# Altium PCB Science-Rev02.PcbDoc (part 2 of 2)
Units mil, origin at the board's own origin, x right, y up, seen from the top; angles counter-clockwise.
Board outline 3390 x 2510 mil, 4 copper layers (Top Layer, Ground Plane, Power Plane, Bottom Layer), stack 23.756 mil thick; 95 components, 67 nets, 328 pads, 254 vias.
Unrouted connection lines stored in the file: 116.
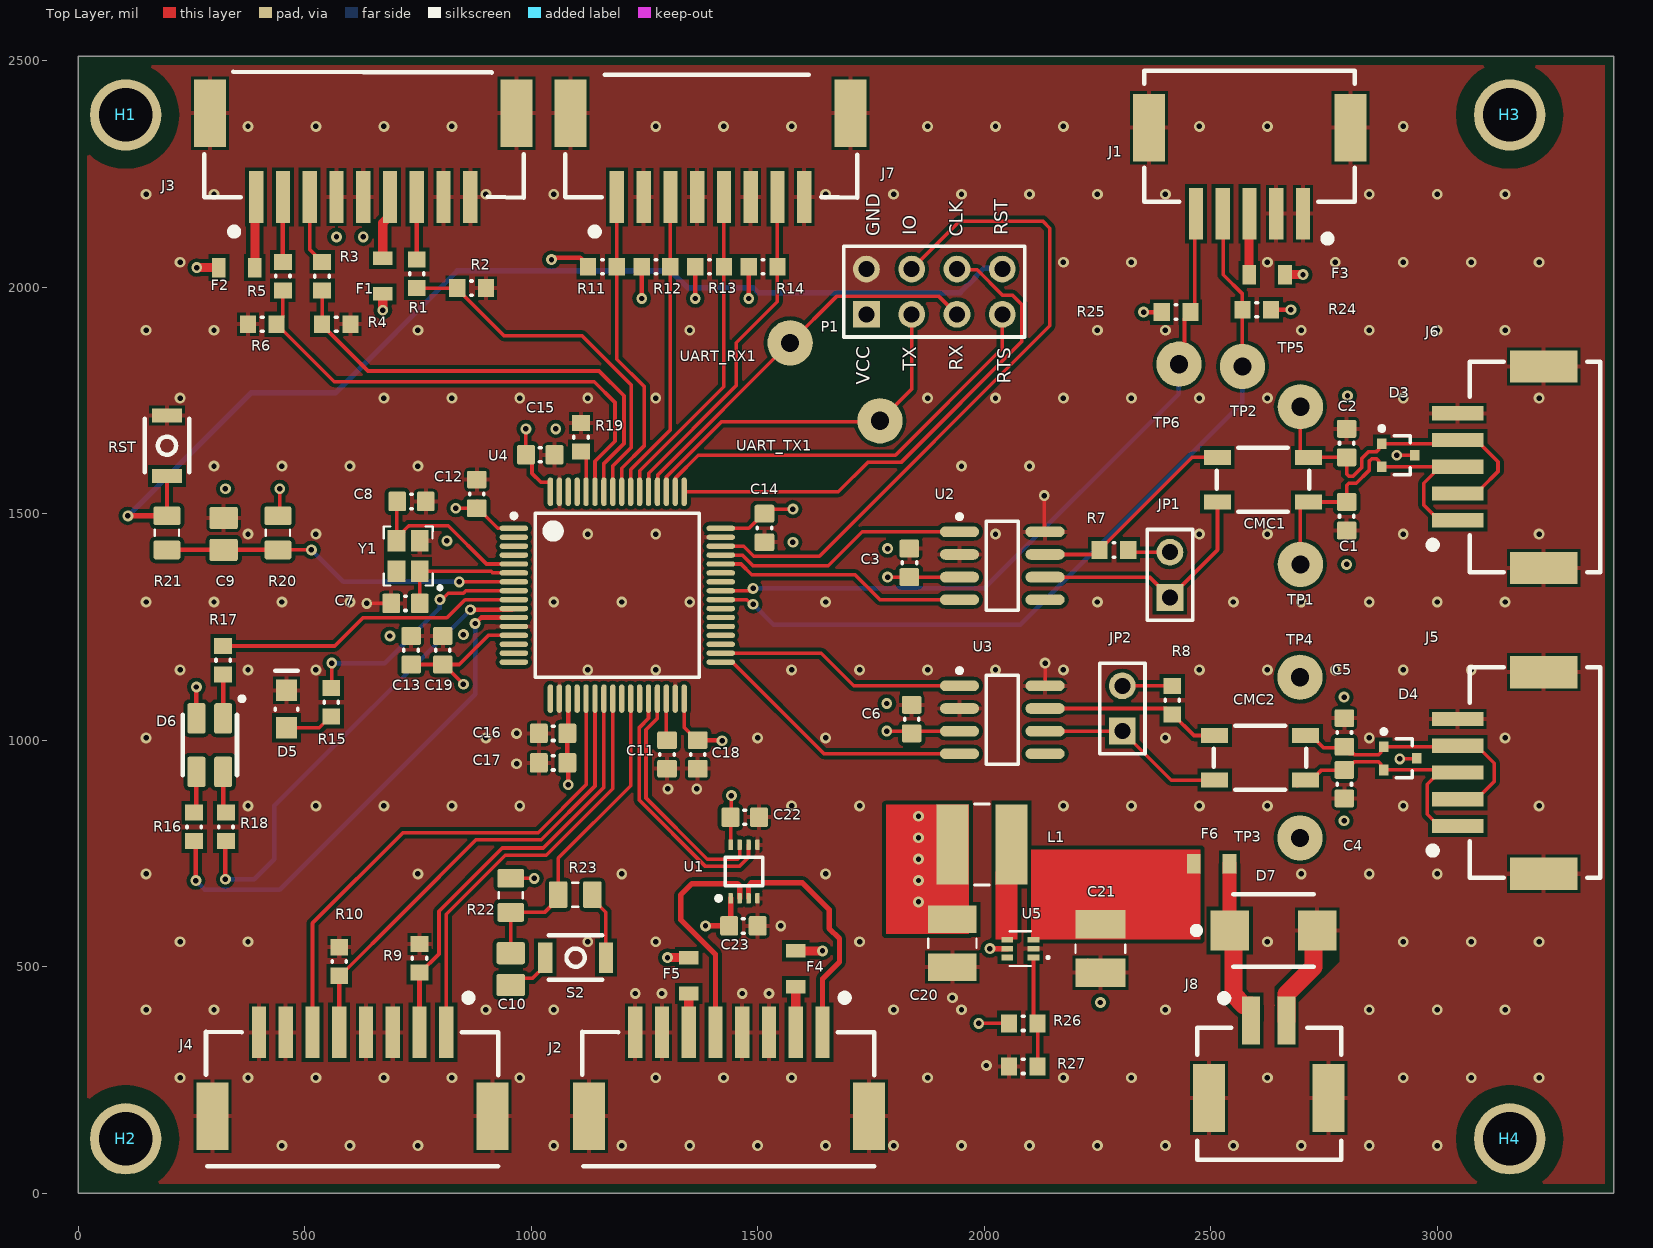
[diagram p0: Top Layer view]

## Via types
v1: diameter 24, hole 12, Top Layer to Bottom Layer, tented both sides, 254 vias

## Nets (pads, with @x,y where several pads share a name; then routed paths per layer and width w, separated by ;. In a path a pad name is that pad's centre, name@x,y a point inside that pad or via, vN(x,y) a via of type N, cw(c..) or ccw(c..) an arc to the next point about the centre after c; other vN are vias at no path point) (continued)
NetF2_1: F2.1 J3.1 | length 159.8
  Top Layer w8: J3.1@390,2195.76 J3.1 ; J3.1@390,2215.37 J3.1@391.89,2217.26
  Top Layer w20: F2.1 J3.1@390,2195.76
NetF3_2: F3.2 J1.3 | length 110.8
  Top Layer w8: J1.3@2584.12,2160.79 J1.3
  Top Layer w20: F3.2 J1.3@2584.96,2136.39
NetF4_1: F4.1 J2.2 | length 100.8
  Top Layer w20: J2.2 F4.1
NetF5_1: F5.1 J2.6 | length 85.8
  Top Layer w20: J2.6 F5.1
NetJP1_2: JP1.2 R7.2 | length 94.1
  Top Layer w8: R7.2 2322.99,1415 JP1.2
NetJP2_2: JP2.2 R8.2 | length 110.2
  Top Layer w8: JP2.2 2414.41,1120 R8.2
NetL1_1: L1.1 U5.4 | length 12.7
  Top Layer w8: L1.1@2050.97,760.68 L1.1
NetR19_1: R19.1 U4.60 | length 93.3
  Top Layer w8: R19.1 1121.26,1625.75 U4.60
NetR23_2: R23.2 S2.1 | length 151.3
  Top Layer w8: R23.2 1135,649.98 1165,619.98 S2.1
NetR26_1: R26.1 R27.2 U5.1 | length 246.9
  Top Layer w8: U5.1 2108.84,384.15 R26.1 R27.2 R27.2@2116,281.99
PWM_DC1: J4.5 R10.2 U4.22 | length 1052.2
  Top Layer w8: R10.2 578.39,480 718.05,619.67 878.39,780 1022.12,780 1140.95,898.83 U4.22
  Top Layer w10: J4.5 R10.2@576.42,476.42
PWM_DC2: J4.2 R9.2 U4.23 | length 959.5
  Top Layer w8: R9.2 755.55,487.01 796.64,528.09 796.64,622.6 936.01,761.97 1026.72,761.97 1160.63,895.89 U4.23
  Top Layer w10: J4.2 R9.2
PWM_ENC_SCI: R1.2 R2.2 U4.57 | length 815.7
  Top Layer w8: R1.2 R2.2 836.91,1995.79 940.04,1892.66 1112.34,1892.66 1221,1784 1221,1646 1180.32,1605.32 U4.57
PWM_ENC_SCI_IN: J3.7 R1.1 | length 138.2
  Top Layer w10: R1.1 J3.7
RESET_n: P1.8 R21.1 RST.1 | length 2365.4
  Top Layer w8: R21.1@195.96,1495 R21.1 RST.1
  Top Layer w12: v1(110,1495) R21.1@195.96,1495
  Bottom Layer w12: v1(110,1495) 381.84,1766.84 567.75,1766.84 836.91,2036 1308.09,2036 1345.09,1999 1490.27,1999 1501.27,1988 1946.73,1988 1981.53,2022.8 1981.53,2024.21 1999.5,2042.19 2031.5,2042.19 P1.8@2033.33,2044.02
SV1_PWM_5V_IN: U1.7 U4.29 | length 521.2
  Top Layer w8: U4.29 1278.74,1048.16 1253.63,1023.05 1253.63,872.52 1388.96,737.18 1455.47,737.18 1460.16,741.87 U1.7
SV1_PWM_OUT: J2.5 U1.2 | length 505.1
  Top Layer w12: J2.5 1406.89,527.11 1330,604 1330,658.07 1355.22,683.29 1455.47,683.29 1460.16,678.6 U1.2
SV2_PWM_5V_IN: U1.6 U4.28 | length 569.7
  Top Layer w8: U4.28 1259.06,1048.27 1239,1028.21 1239,867.35 1385,721.35 1459.43,721.35 1479.84,741.76 U1.6
SV2_PWM_OUT: J2.1 U1.3 | length 528.7
  Top Layer w12: U1.3 1479.84,678.5 1486.34,685 1599,685 1658,626 1658,584.72 1680.59,562.13 1680.59,510.59 1643.11,473.11 J2.1
SWD_CLK: P1.7 U4.49 | length 1161.3
  Top Layer w8: U4.49 1678.09,1548.35 1742.86,1613.12 1816.3,1613.12 2083.23,1880.05 2083.23,1961.77 2062.62,1982.38 2040.31,1982.38 1984.53,2038.16 1954.16,2038.16 1940,2024 P1.7
SWD_IO: P1.6 U4.46 | length 1516.7
  Top Layer w8: U4.46 1469.15,1428.27 1491.1,1406.32 1636.32,1406.32 2145,1915 2145,2130 2129.14,2145.86 1945.86,2145.86 P1.6
UART_RTS: P1.4 U4.50 | length 945.5
  Top Layer w8: U4.50 1318.46,1548.69 1318.46,1578.51 1369.07,1629.12 1804.12,1629.12 2040,1865 P1.4
UART_RX: P1.3 U4.52 UART_RX1.1 | length 877.5
  Top Layer w8: U4.52 1279.09,1548.69 1279.09,1584.98 1571.11,1877 UART_RX1.1 1674.22,1979.53 1900.47,1979.53 P1.3
UART_TX: P1.2 U4.51 UART_TX1.1 | length 819.6
  Top Layer w8: U4.51 1298.77,1548.69 1298.77,1581.45 1420.32,1703 1768,1703 1840,1775 P1.2
pads on no net: H1.0 H2.0 H3.0 H4.0 U2.5 U3.5 U4.2 U4.3 U4.4 U4.14 U4.15 U4.16 U4.17 U4.20 U4.25 U4.27 U4.35 U4.36 U4.37 U4.38 U4.39 U4.42 U4.43 U4.61 U4.62 U5.6 Y1.4
copper on no net:
  other v1: 2256.52,421 2794.59,822.22 1785,1080.94 2794.59,1095 688.24,1230 850.54,1232.95 2800,1388 1787.01,1422.99 1577.65,1437.01 814.05,1440 325,1555 1054.45,1687.2 2801.97,1760.26 570.36,2111 629.42,2111

## Polygon pours and split planes (outlines as drawn)
3V3 on Power Plane "NONET_L-01_P-001" (solid, remove dead copper, pour order 9): 0,0 0,2510 10,2510 3390,2510 3385,5 3385,0
5V0 on Power Plane "NONET_L-01_P-001" (solid, remove dead copper, pour order 8): 615,1985 730,1985 796.64,1918.36 796.64,654.21 2335,654.21 2335,455 690,455 615,530
GND on Bottom Layer "NONET_L-01_P-001" (solid, remove dead copper, pour order 71): 0,2510 0,0 3390,0 3390,2510
no net on Bottom Layer "NONET_L-01_P-001" (solid, remove dead copper, pour order 70): 5,2510
no net on Bottom Layer "NONET_L-01_P-001" (solid, pour order 10): 0,2510
GND on Top Layer "NONET_L-01_P-001" (solid, remove dead copper, pour order 56): 0,2510 3390,2510 3390,0 0,0
5V0 on Top Layer "NONET_L-01_P-001" (solid, remove dead copper, pour order 59): 2185.7,571.5
5V0 on Top Layer "NONET_L-01_P-001" (solid, remove dead copper, pour order 58): 2143.68,549.06
GND on Ground Plane "NONET_L-01_P-001" (solid, remove dead copper, pour order 5): 0,2510 0,-5 5,0 3390,0 3390,2505 3385,2510

## Other copper
Top Layer:
  rectangle net 3V3: 1783,572 1967,858
  rectangle net 5V0: 2103.53,559.68 2478,759
  rectangle net NetL1_1: 2025,559.68 2074,710
  pour cut-out: 2667.48,440.41 2709.31,482.24 2735,482.24 2735,462.93 2686.48,414.41
  pour cut-out: 2641.8,440.41 2641.8,456.31 2715,529.51 2783.52,529.51 2783.52,511.45 2710.74,438.67
  region net GND: 2641.8,415.89 2641.8,414.09 2640,414.09
  pour cut-out: 2783.52,529.51 2693.17,439.16 2693.17,414.09 2640,414.09 2686.48,460.57 2686.48,529.51
  pour cut-out: 2686.48,529.51 2641.8,484.83
  pour cut-out: 2715,538
  pour cut-out: 2641.8,440.41 2693.17,440.41 2693.17,322.11 2641.8,322.11
  pour cut-out: 2640,451
  region: 2164,545
  region: 2070,485
  region: 2108.84,559.68

## Silkscreen, mask and mechanical layers (free items; w line width, h text height)
Bottom Overlay:
  region: 1196 vertices and 5 holes, not listed, extent 123.45,274.16 1787.45,1050.16
  text "UW-MARS-ROVER-SCIENCE-A                                             AUG 2020 / SCIENCE BOARD Rev 2" at 2835.58,2190.58 h80
  text "Designed by: / Wolfgang Windholtz / Kyle Hong" at 1270.06,2135.87 h110

## Text inside footprints (layer, text, board x,y; h text height)
L1: Mechanical 13 "*" at 2081.97,819.68 h50 r180
P1: Top Overlay "GND" at 1770,2112 h30 r90; Top Overlay "VCC" at 1747.87,1784.33 h30 r90; Top Overlay "RST" at 2051.81,2115.04 h30 r90; Top Overlay "CLK" at 1952.6,2111.1 h30 r90; Top Overlay "IO" at 1850.24,2115.04 h30 r90; Top Overlay "RTS" at 2058.9,1787.28 h30 r90; Top Overlay "RX" at 1952.6,1815.91 h30 r90; Top Overlay "TX" at 1850.24,1815.91 h30 r90